# Altium PCB MODULAR_PCB.PcbDoc (part 1 of 2)
Units mil, origin at the board's own origin, x right, y up, seen from the top; angles counter-clockwise.
Board outline 3480 x 3849.93 mil, 2 copper layers (Top Layer, Bottom Layer); 170 components, 80 nets, 391 pads, 342 vias.
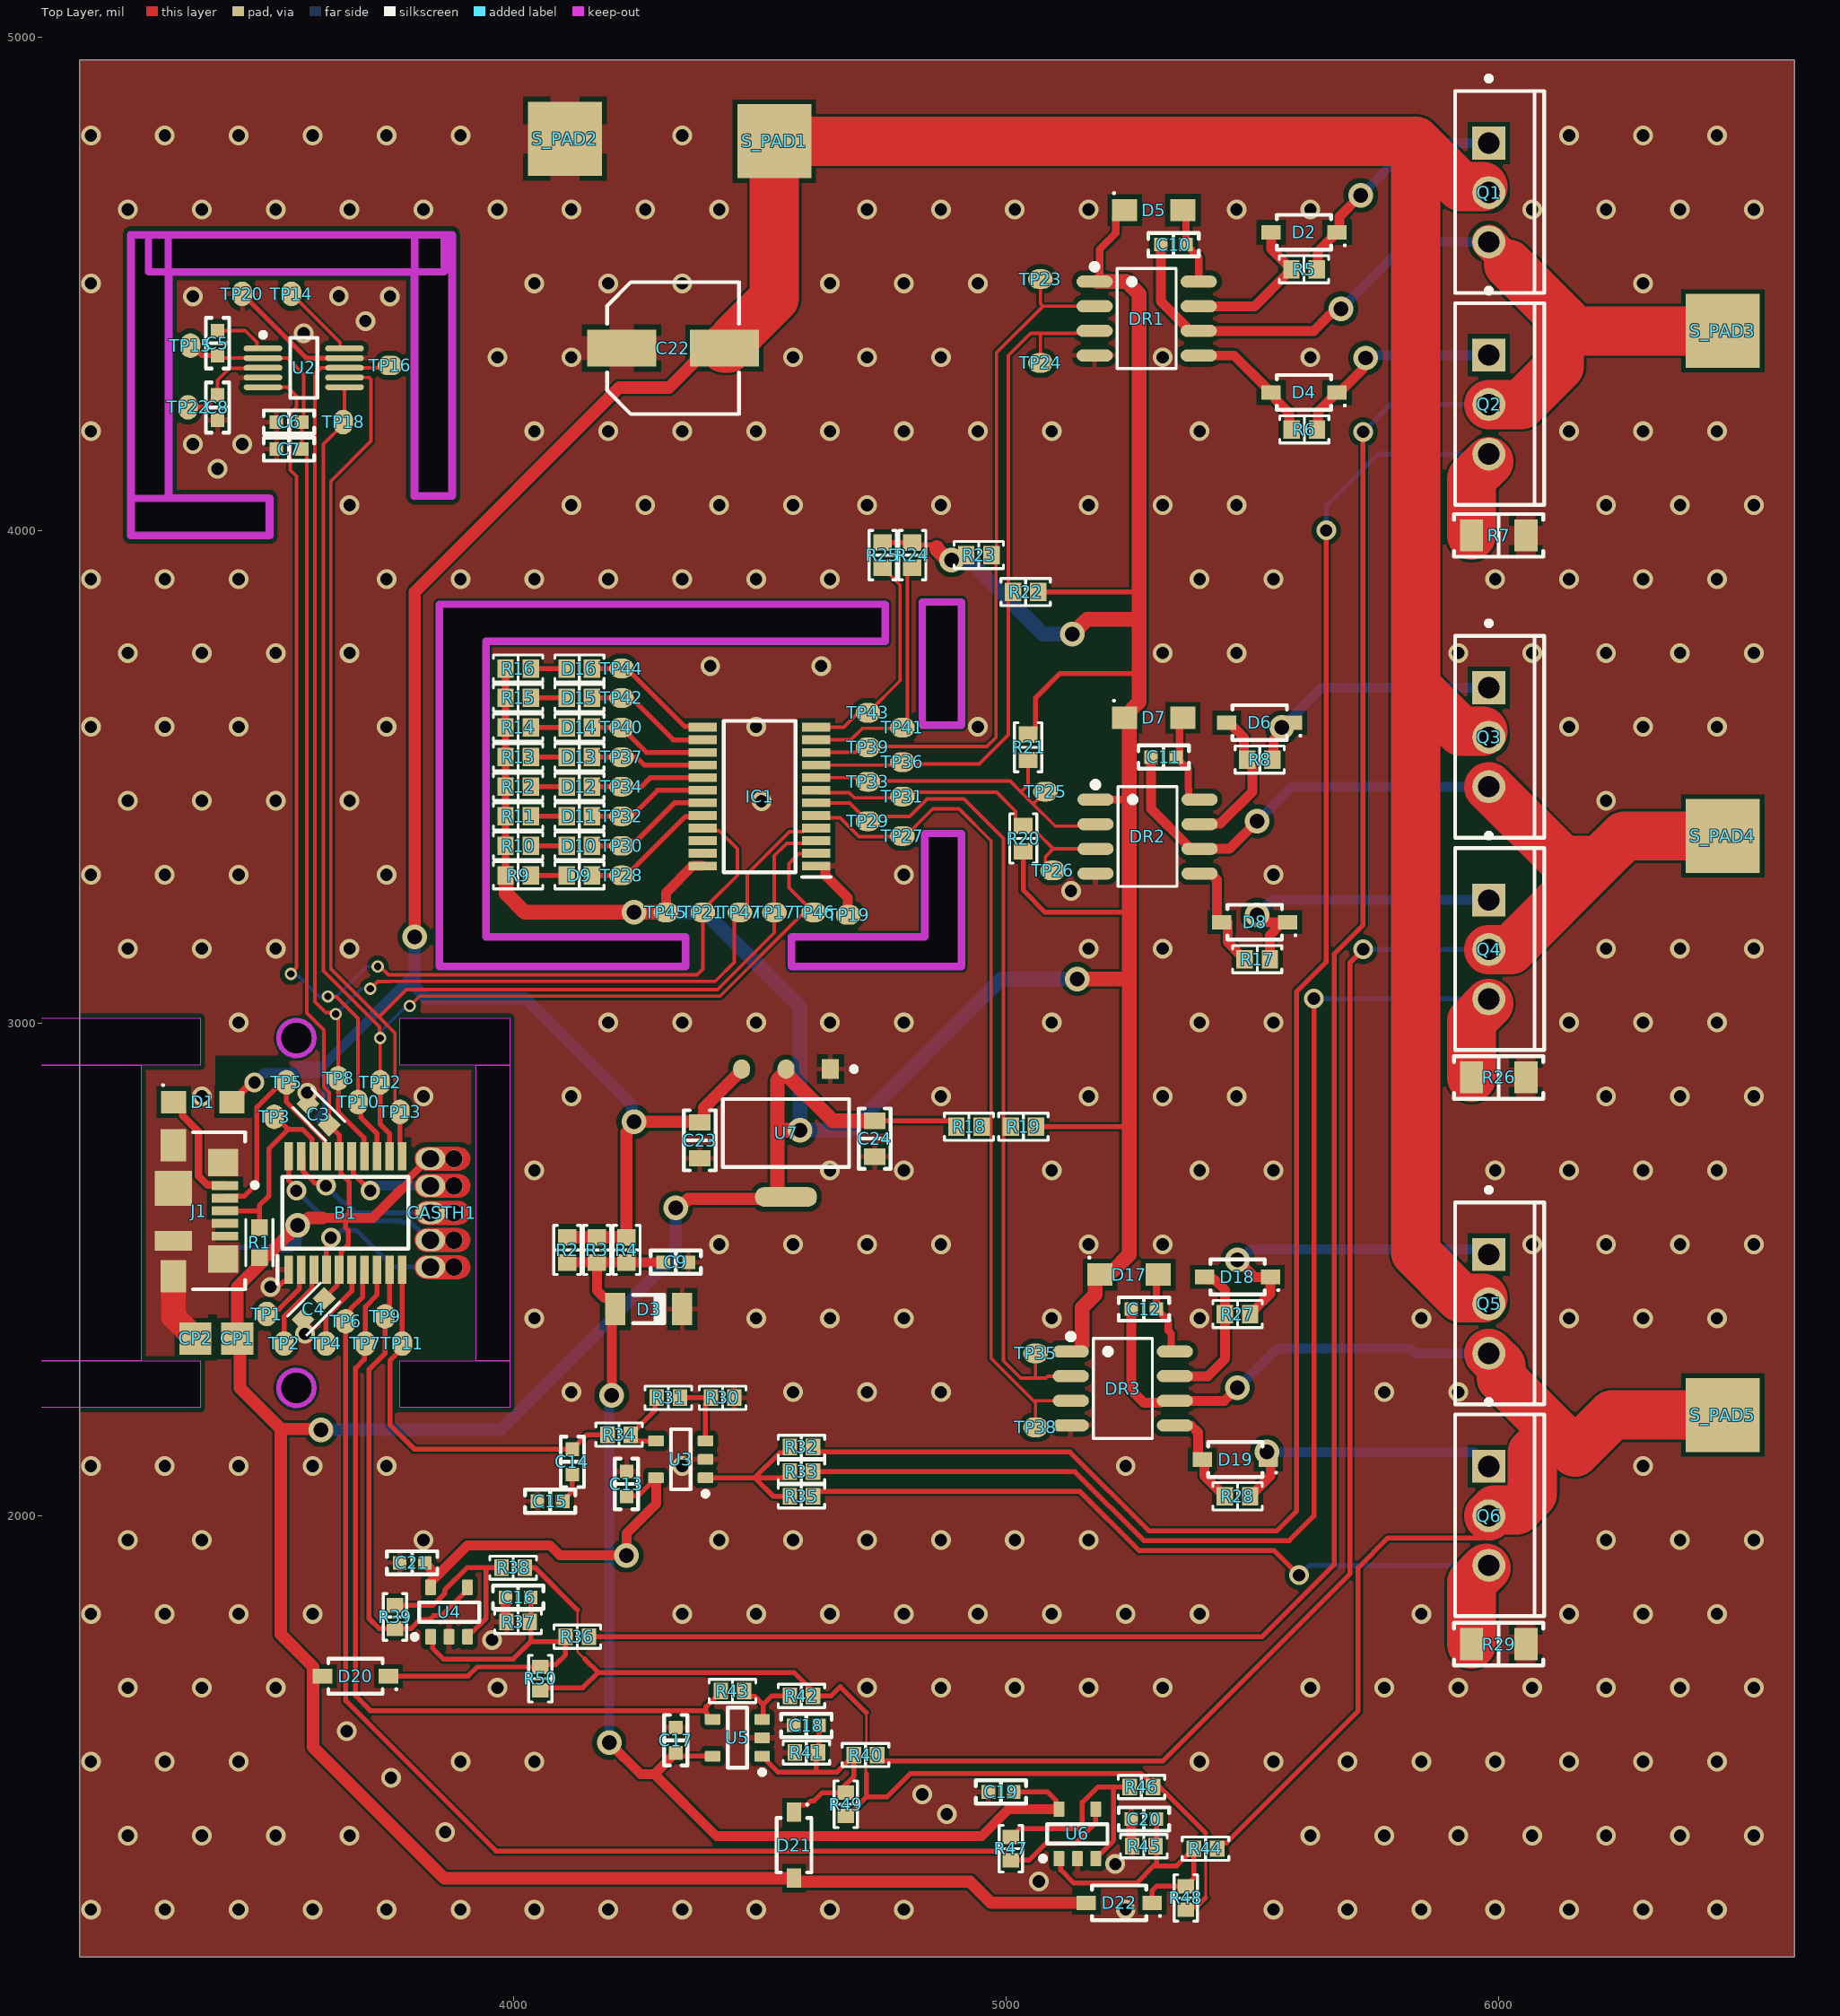
[diagram p0: Top Layer view]
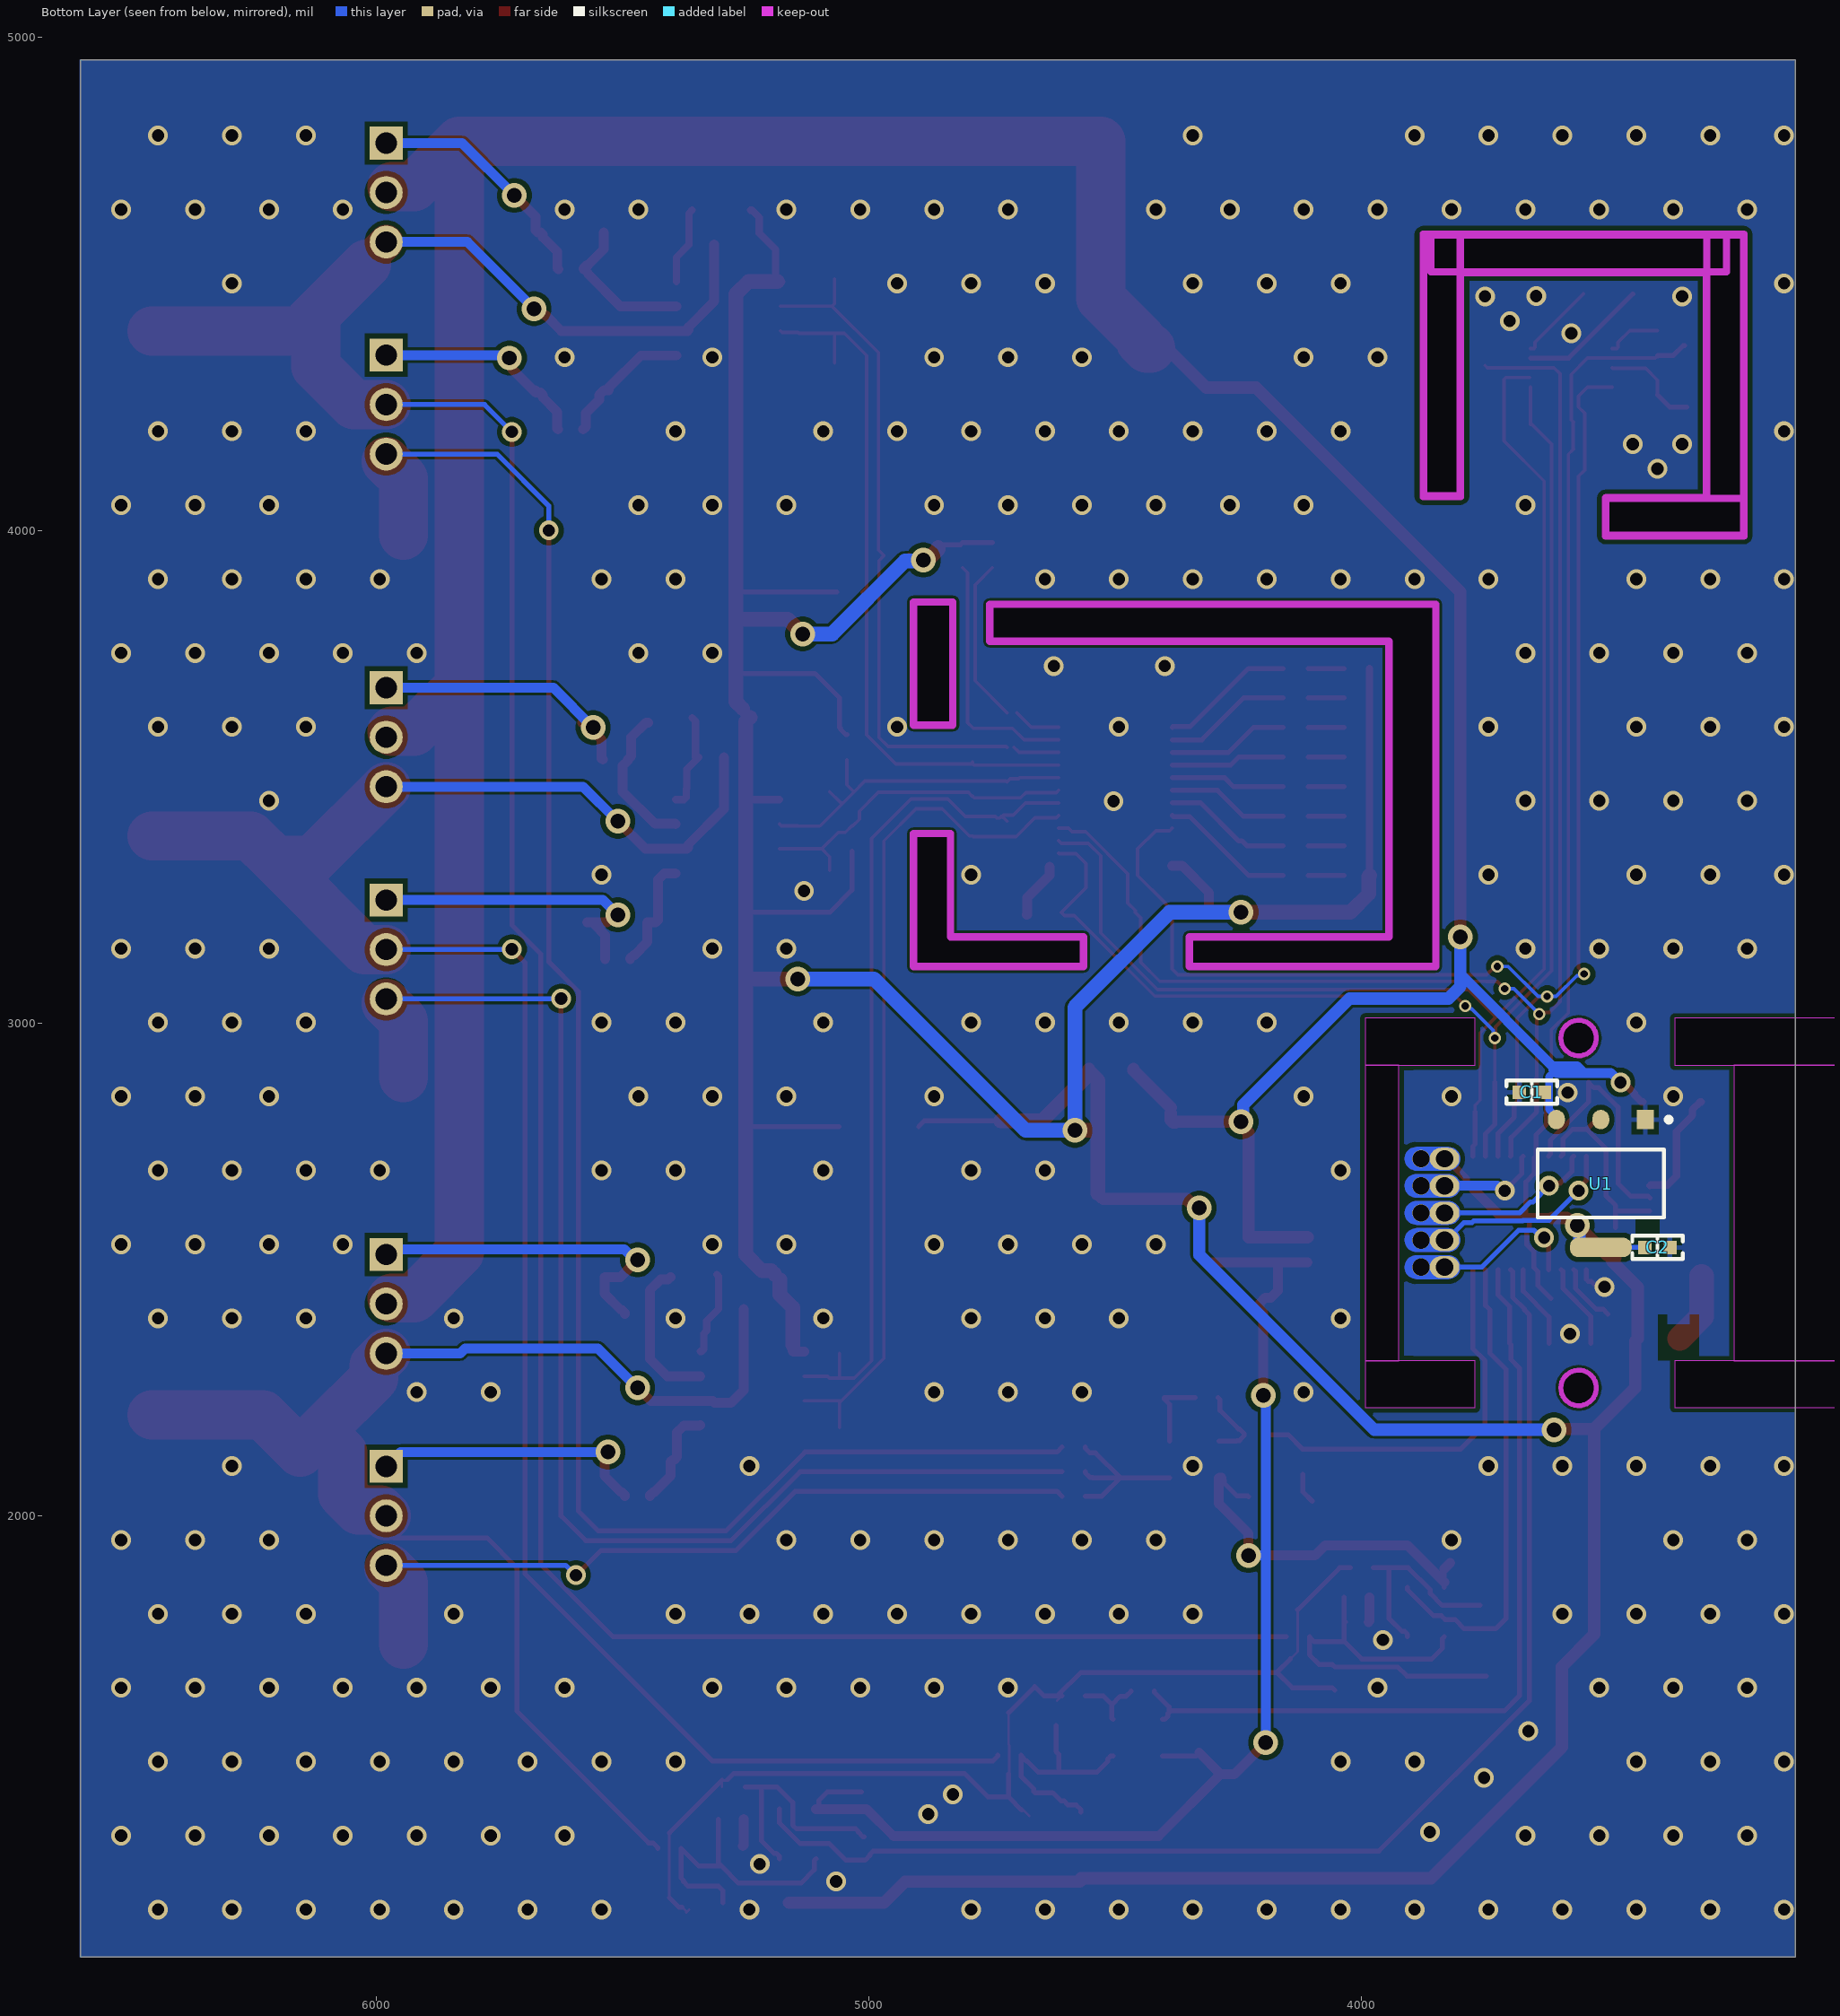
[diagram p1: Bottom Layer view, seen from below]
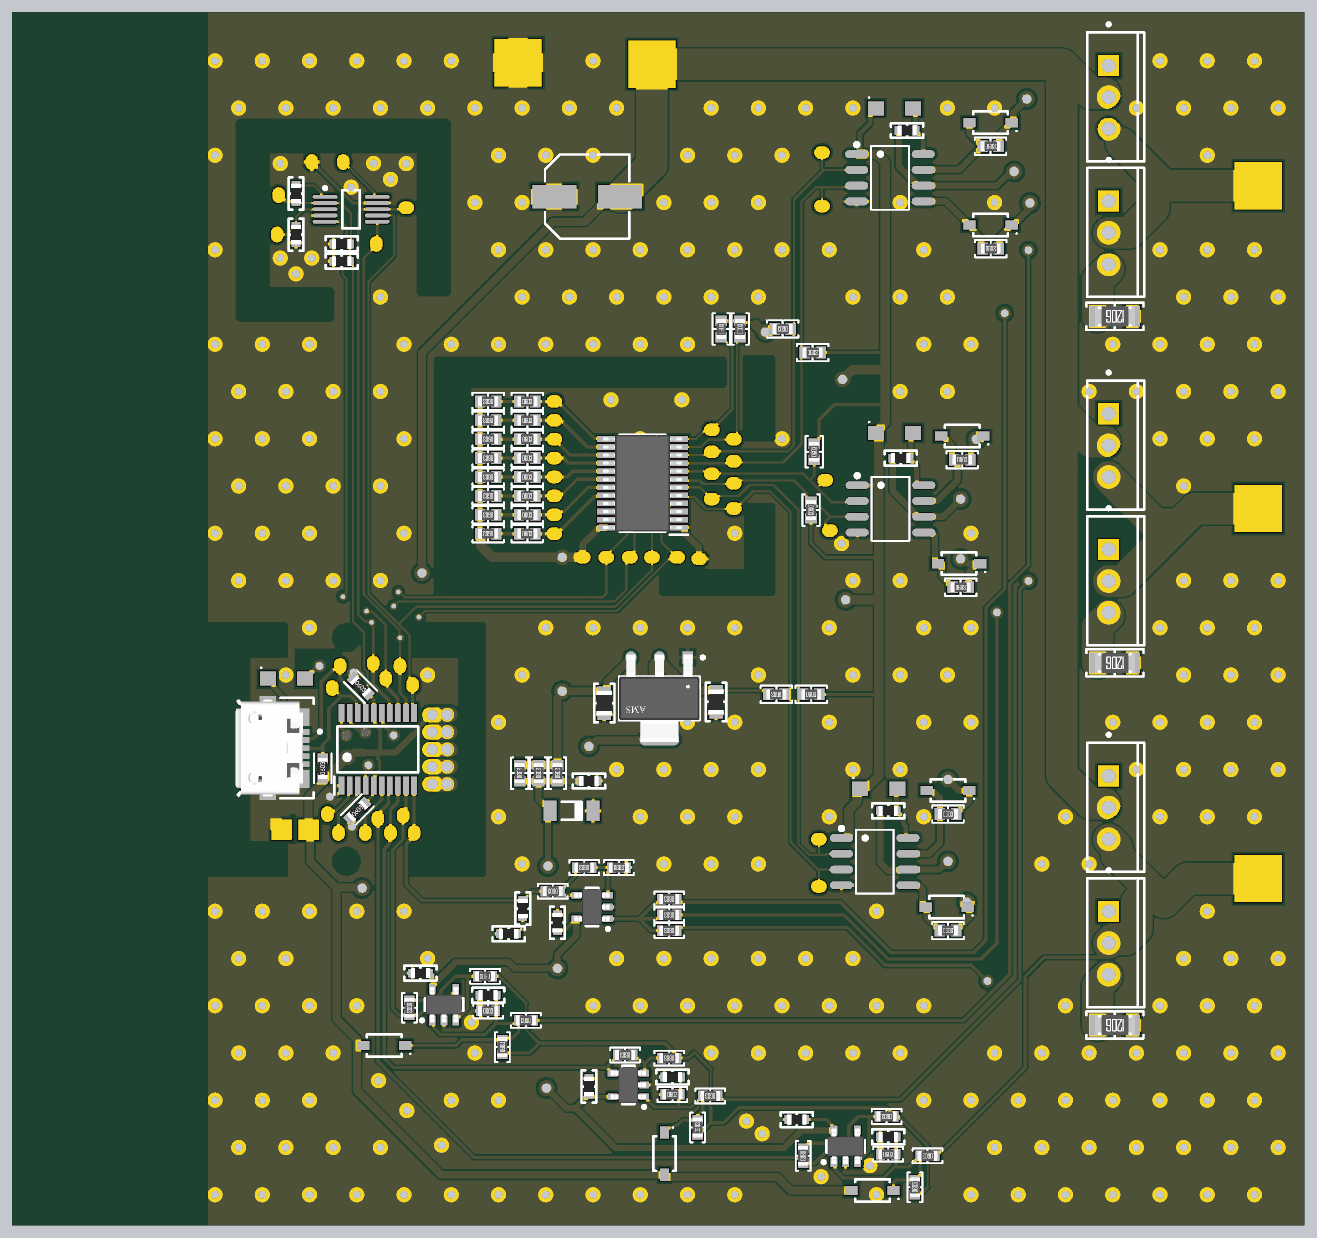
[diagram p3: 3D render of the assembled board from above, using the file's embedded part models]
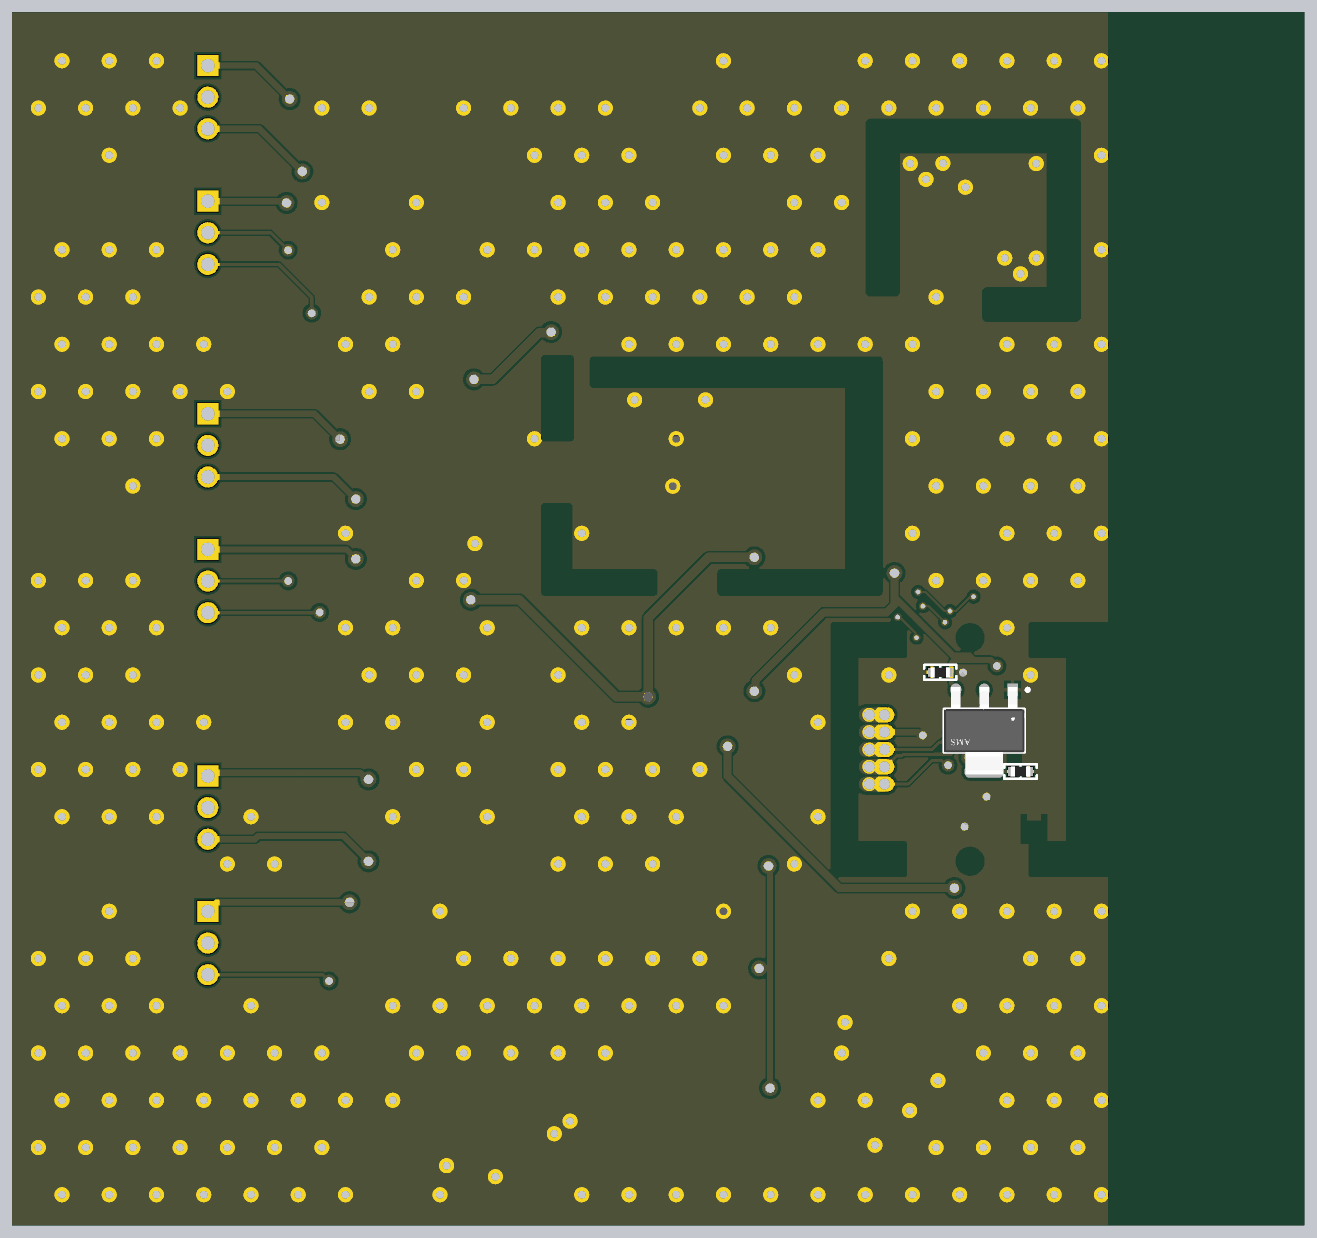
[diagram p4: 3D render of the assembled board from below, using the file's embedded part models]

## Layer stack, top to bottom
Top Solder: solder mask 0.4, Solder Resist, Dk 3.5
Top Layer: signal copper 1.4
Dielectric 1: dielectric 12.6, FR-4, Dk 4.8
Bottom Layer: signal copper 1.4
Bottom Solder: solder mask 0.4, Solder Resist, Dk 3.5

## Board outline
3120,1105.07 3120,4955 6600,4955 6600,1105.07
cut-out: 3225,3982.49 cw(c3225,3990) 3217.49,3990 3217.49,4600 cw(c3225,4600) 3225,4607.52 3875,4607.52 cw(c3875,4600) 3882.51,4600 3882.51,4070 cw(c3875,4070) 3875,4062.49 3800,4062.49 cw(c3800,4070) 3792.49,4070 3792.49,4517.48 3307.51,4517.48 3307.51,4072.51 3505,4072.51 cw(c3505,4065) 3512.51,4065 3512.51,3990 cw(c3505,3990) 3505,3982.49
cut-out: 3523.94,2260 ccw(c3560,2260) 3560,2223.94 ccw(c3560,2260) 3596.06,2260 ccw(c3560,2260) 3560,2296.06 ccw(c3560,2260)
cut-out: 3523.94,2970 ccw(c3560,2970) 3560,2933.94 ccw(c3560,2970) 3596.06,2970 ccw(c3560,2970) 3560,3006.06 ccw(c3560,2970)
cut-out: 3993,2315 3925,2315 3925,2915 3993,2915
cut-out: 4830,3605 4830,3855 4910,3855 4910,3605
cut-out: 3850,3115 3850,3850 4755,3850 4755,3775 3945,3775 3945,3175 4350,3175 4350,3115
cut-out: 4565,3115 4565,3175 4835,3175 4835,3385 4910,3385 4910,3115
cut-out: 3245,2315 2500,2315 2500,2915 3245,2915
cut-out: 3365,2315 3365,2220 2500,2220 2500,2315
cut-out: 3365,3010 3365,2915 2500,2915 2500,3010
cut-out: 3993,3010 3993,2915 3770,2915 3770,3010
cut-out: 3993,2315 3993,2220 3770,2220 3770,2315

## Design rules (kind name [scope] priority, off if disabled: settings)
Clearance [All] p1: gap=10 ignorepadtopadclearanceinfootprint=FALSE except(5: Arc-THPad Arc-Fill Arc-Poly Arc-Region Track-THPad Track-Fill Track-Poly Track-Region SMDPad-SMDPad SMDPad-THPad SMDPad-Via THPad-THPad; 6: Arc-Arc Arc-Track Arc-SMDPad Track-Track Track-SMDPad)
ComponentClearance [All] p1: gap=7 collisioncheckmode=3 verticalgap=10 showdistances=FALSE donotcheckwithout3dbody=TRUE
PolygonConnect res_1206 [All vs HasFootprint('RES 1206_3216')] p1: connectstyle=Relief reliefconductorwidth=40 reliefentries=4 polygonreliefangle="90 Angle" conductorbypadedge=TRUE mindistance=15 enablemindistance=FALSE airgapwidth=10
PolygonConnect USB [InNet('GND') vs HasFootprint('FP-473460001-MFG')] p2: connectstyle=Direct reliefconductorwidth=10 reliefentries=4 polygonreliefangle="90 Angle" airgapwidth=10
PolygonConnect POWER_PAD [InNet('GND') vs HasFootprint('POWER_PAD')] p3: thpad.connectstyle=Relief thpad.reliefconductorwidth=10 thpad.reliefentries=4 thpad.polygonreliefangle="90 Angle" thpad.airgapwidth=10 smdpad.connectstyle=Relief smdpad.reliefconductorwidth=60 smdpad.reliefentries=4 smdpad.polygonreliefangle="90 Angle" smdpad.airgapwidth=10 smdpad.conductorbypadedge=TRUE smdpad.mindistance=15 smdpad.enablemindistance=FALSE via.connectstyle=Relief via.reliefconductorwidth=10 via.reliefentries=4 via.polygonreliefangle="90 Angle" via.airgapwidth=10
PolygonConnect electrolytic_cap [All vs HasFootprint('CAPAE7266X80M')] p4: connectstyle=Relief reliefconductorwidth=50 reliefentries=4 polygonreliefangle="90 Angle" airgapwidth=10
PolygonConnect general [All] p5: thpad.connectstyle=Relief thpad.reliefconductorwidth=10 thpad.reliefentries=4 thpad.polygonreliefangle="90 Angle" thpad.airgapwidth=10 smdpad.connectstyle=Relief smdpad.reliefconductorwidth=10 smdpad.reliefentries=4 smdpad.polygonreliefangle="90 Angle" smdpad.airgapwidth=10 via.connectstyle=Direct via.reliefconductorwidth=10 via.reliefentries=4 via.polygonreliefangle="90 Angle" via.airgapwidth=10
RoutingVias [All] p1: holewidth=15 width=25 viastyle="Through Hole" minholewidth=12 minwidth=20 maxholewidth=30 maxwidth=50
SolderMaskExpansion [All] p1: expansion=4 istentingtop=FALSE
SupplyNets "Schematic Supply Nets_3" [InNet('+5')] p1: voltage=0.000
SupplyNets "Schematic Supply Nets_2" [InNet('12V')] p2: voltage=0.000
SupplyNets "Schematic Supply Nets_1" [InNet('GND')] p3: voltage=0.000
SupplyNets "Schematic Supply Nets" [InNet('3V3')] p4: voltage=0.000
Width [All] p1: maxlimit=100 minlimit=5 preferedwidth=7 minimp=50.000000 maximp=50.000000 favimp=50.000000
29 further rules are at their usual default settings.

## Classes and differential pairs
component class MAIN_DRIVER: C5 C6 C7 C8 C9 C10 C11 C12 C22 C23 C24 D2 D3 D4 D5 D6 D7 D8 D9 D10 D11 D12 D13 D14 D15 D16 D17 D18 D19 DR1 DR2 DR3 IC1 Q1 Q2 Q3 Q4 Q5 Q6 R2 R3 R4 R5 R6 R7 R8 R9 R10 R11 R12 R13 R14 R15 R16 R17 R18 R19 R20 R21 R22 R23 R24 R25 R26 R27 R28 R29 S_PAD1 S_PAD2 S_PAD3 S_PAD4 S_PAD5 TP14 TP15 TP16 TP17 TP18 TP19 TP20 TP21 TP22 TP23 TP24 TP25 TP26 TP27 TP28 TP29 TP30 TP31 TP32 TP33 TP34 TP35 TP36 TP37 TP38 TP39 TP40 TP41 TP42 TP43 TP44 TP45 TP46 TP47 U2 U7
component class Designator: B1 C1 C2 C3 C4 CASTH1 CP1 CP2 D1 J1 R1 TP1 TP2 TP3 TP4 TP5 TP6 TP7 TP8 TP9 TP10 TP11 TP12 TP13 U1

## Components (designator, comment, footprint, x,y, rotation, side; value= is the part's Value field where it differs from the comment)
B1 "ch32v203f6p6" SOP65P640X110-20N 3659.57,2615.16 r90 top
C1 "Capacitor" "CAP FILM 0603_1608" 3655,2860 r180 bottom value=10u
C2 "Capacitor" "CAP FILM 0603_1608" 3400,2545 r0 bottom value=10u
C3 "Capacitor" SMD-0603-RES 3605,2815 r225 top value=100n
C4 "Capacitor" SMD-0603-RES 3595,2420 r315 top value=100n
C5 "Capacitor" "CAP FILM 0603_1608" 3400,4380 r270 top value=100n
C6 "Capacitor" "CAP FILM 0603_1608" 3545,4220 r0 top value=100n
C7 "Capacitor" "CAP FILM 0603_1608" 3545,4165 r180 top value=10u
C8 "Capacitor" "CAP FILM 0603_1608" 3400,4249.41 r90 top value=100n
C9 "Capacitor" "CAP FILM 0603_1608" 4330,2515 r180 top value=1u
C10 "Capacitor" "CAP FILM 0603_1608" 5340,4580 r0 top value=10uF
C11 "Capacitor" "CAP FILM 0603_1608" 5320,3540 r180 top value=10uF
C12 "Capacitor" "CAP FILM 0603_1608" 5280,2420 r0 top value=10uF
C13 "Capacitor" "CAP FILM 0603_1608" 4230,2065 r90 top value=100n
C14 "Capacitor" "CAP FILM 0603_1608" 4120,2110 r90 top value=1n
C15 "Capacitor" "CAP FILM 0603_1608" 4075,2030 r0 top value=1n
C16 "Capacitor" "CAP FILM 0603_1608" 4010,1835 r0 top value=1n
C17 "Capacitor" "CAP FILM 0603_1608" 4330,1545 r90 top value=100n
C18 "Capacitor" "CAP FILM 0603_1608" 4595,1575 r0 top value=1n
C19 "Capacitor" "CAP FILM 0603_1608" 4990,1440 r180 top value=100n
C20 "Capacitor" "CAP FILM 0603_1608" 5280,1385 r0 top value=1n
C21 "Capacitor" "CAP FILM 0603_1608" 3795,1905 r180 top value=100n
C22 "Capacitor" CAPAE7266X80M 4324.33,4370 r0 top value=150u
C23 "Capacitor" "CAP FILM 0805" 4378.68,2762.27 r90 top value=10u
C24 "Capacitor" "CAP FILM 0805" 4733.68,2765.85 r90 top value=10u
CASTH1 "CastHeaderx5" CASTHEADERX5 3842.47,2630.71 r180 top
CP1 "CONNECT_PAD" PAD_SQUARE 3440,2360 r90 top
CP2 "CONNECT_PAD" PAD_SQUARE 3355,2360 r180 top
D1 "FR107" SODFL365X110-2N 3370,2840 r0 top
D2 "1N4148" SODFL375X135-2N 5605,4605 r180 top
D3 "Zener Diode" DIOMELF3514N 4275,2420 r180 top
D4 "1N4148" SODFL375X135-2N 5605,4280 r180 top
D5 "Diode" SODFL365X110-2N 5300,4650 r0 top
D6 "1N4148" SODFL375X135-2N 5515,3610 r180 top
D7 "Diode" SODFL365X110-2N 5300,3620 r0 top
D8 "1N4148" SODFL375X135-2N 5505,3205 r180 top
D9 "Light-Emitting Diode" "RES 0603_1608" 4134.41,3300 r0 top
D10 "Light-Emitting Diode" "RES 0603_1608" 4134.41,3360 r0 top
D11 "Light-Emitting Diode" "RES 0603_1608" 4134.41,3420 r0 top
D12 "Light-Emitting Diode" "RES 0603_1608" 4134.41,3480 r0 top
D13 "Light-Emitting Diode" "RES 0603_1608" 4134.41,3540 r0 top
D14 "Light-Emitting Diode" "RES 0603_1608" 4134.41,3600 r0 top
D15 "Light-Emitting Diode" "RES 0603_1608" 4134.41,3660 r0 top
D16 "Light-Emitting Diode" "RES 0603_1608" 4134.41,3720 r0 top
D17 "Diode" SODFL365X110-2N 5250,2490 r0 top
D18 "1N4148" SODFL375X135-2N 5470,2485 r180 top
D19 "1N4148" SODFL375X135-2N 5465.6,2114.48 r180 top
D20 "1N4148W" SODFL375X135-2N 3680,1675 r180 top
D21 "1N4148W" SODFL375X135-2N 4570,1331.93 r270 top
D22 "1N4148W" SODFL375X135-2N 5230,1215 r180 top
DR1 "GR3115" PCBComponent_1 5278.29,4431.12 r270 top
DR2 "GR3115" PCBComponent_1 5280,3380 r270 top
DR3 "GR3115" PCBComponent_1 5230,2260 r270 top
IC1 "STP16C596ATTR" SOP65P638X110-24N 4500,3460 r180 top
J1 "473460001" FP-473460001-MFG 3324.06,2619.41 r270 top
Q1 "STP80NF55-06" STM-TO-220A-3 5980,4685.79 r0 top
Q2 "STP80NF55-06" STM-TO-220A-3 5980,4255.39 r0 top
Q3 "STP80NF55-06" STM-TO-220A-3 5980,3580.39 r0 top
Q4 "STP80NF55-06" STM-TO-220A-3 5980,3149.61 r0 top
Q5 "STP80NF55-06" STM-TO-220A-3 5980,2430.39 r0 top
Q6 "STP80NF55-06" STM-TO-220A-3 5980,2000.39 r0 top
R1 "Resistor" SMD-0603-RES 3485,2555 r0 top value=10K
R2 "Resistor" "RES 0603_1608" 4110,2540 r90 top value=1K
R3 "Resistor" "RES 0603_1608" 4170,2540 r90 top value=1K
R4 "Resistor" "RES 0603_1608" 4230,2540 r90 top value=1K
R5 "Resistor" "RES 0603_1608" 5605,4530 r0 top value=10R
R6 "Resistor" "RES 0603_1608" 5605.59,4205 r0 top value=10R
R7 "Resistor" "RES 1206_3216" 6000,3990 r180 top value=0.001R
R8 "Resistor" "RES 0603_1608" 5515,3535 r0 top value=10R
R9 "Resistor" "RES 0603_1608" 4010,3300 r180 top value=100R
R10 "Resistor" "RES 0603_1608" 4010,3360 r180 top value=100R
R11 "Resistor" "RES 0603_1608" 4010,3420 r180 top value=100R
R12 "Resistor" "RES 0603_1608" 4010,3480 r180 top value=100R
R13 "Resistor" "RES 0603_1608" 4010,3540 r180 top value=100R
R14 "Resistor" "RES 0603_1608" 4010,3600 r180 top value=100R
R15 "Resistor" "RES 0603_1608" 4010,3660 r180 top value=100R
R16 "Resistor" "RES 0603_1608" 4010,3720 r180 top value=100R
R17 "Resistor" "RES 0603_1608" 5510,3130 r0 top value=10R
R18 "Resistor" "RES 0603_1608" 4925,2790 r180 top value=10K
R19 "Resistor" "RES 0603_1608" 5035.59,2790 r0 top value=10K
R20 "Resistor" "RES 0603_1608" 5035,3375 r270 top value=10K
R21 "Resistor" "RES 0603_1608" 5045,3560 r90 top value=10K
R22 "Resistor" "RES 0603_1608" 5040,3875 r0 top value=10K
R23 "Resistor" "RES 0603_1608" 4945,3950 r180 top value=10K
R24 "Resistor" "RES 0603_1608" 4810,3950 r90 top value=10K
R25 "Resistor" "RES 0603_1608" 4750,3950 r90 top value=10K
R26 "Resistor" "RES 1206_3216" 6000,2890 r180 top value=0.001R
R27 "Resistor" "RES 0603_1608" 5470,2410 r0 top value=10R
R28 "Resistor" "RES 0603_1608" 5470,2040 r0 top value=10R
R29 "Resistor" "RES 1206_3216" 6000,1740 r180 top value=0.001R
R30 "Resistor" "RES 0603_1608 RF" 4425,2240 r0 top value=5K1
R31 "Resistor" "RES 0603_1608 RF" 4315,2240 r180 top value=39K
R32 "Resistor" "RES 0603_1608 RF" 4585,2140 r180 top value=1K
R33 "Resistor" "RES 0603_1608 RF" 4585,2090 r180 top value=1K
R34 "Resistor" "RES 0603_1608 RF" 4215,2165 r180 top value=5.1K
R35 "Resistor" "RES 0603_1608 RF" 4585,2040 r180 top value=1K
R36 "Resistor" "RES 0603_1608 RF" 4130,1755 r180 top value=22K
R37 "Resistor" "RES 0603_1608 RF" 4010,1785 r0 top value=4K7
R38 "Resistor" "RES 0603_1608 RF" 4000,1895 r180 top value=16K
R39 "Resistor" "RES 0603_1608 RF" 3760,1795 r270 top value=10K
R40 "Resistor" "RES 0603_1608 RF" 4715,1515 r180 top value=22K
R41 "Resistor" "RES 0603_1608 RF" 4595,1520 r0 top value=4K7
R42 "Resistor" "RES 0603_1608 RF" 4585,1635 r180 top value=16K
R43 "Resistor" "RES 0603_1608 RF" 4445,1645 r180 top value=10K
R44 "Resistor" "RES 0603_1608 RF" 5405,1325 r180 top value=22K
R45 "Resistor" "RES 0603_1608 RF" 5280,1330 r0 top value=4K7
R46 "Resistor" "RES 0603_1608 RF" 5275,1450 r180 top value=16K
R47 "Resistor" "RES 0603_1608 RF" 5010,1325 r270 top value=10K
R48 "Resistor" "RES 0603_1608 RF" 5365,1225 r90 top value=22K
R49 "Resistor" "RES 0603_1608 RF" 4675,1415 r90 top value=22K
R50 "Resistor" "RES 0603_1608 RF" 4055,1670 r90 top value=22K
S_PAD1 "SOLDER_PAD" POWER_PAD 4530,4790 r180 top
S_PAD2 "SOLDER_PAD" POWER_PAD 4105,4795 r180 top
S_PAD3 "SOLDER_PAD" POWER_PAD 6455,4405 r180 top
S_PAD4 "SOLDER_PAD" POWER_PAD 6455,3380 r180 top
S_PAD5 "SOLDER_PAD" POWER_PAD 6455,2205 r180 top
TP1 "Value" ROUND_SMALL 3500,2410 r180 top
TP2 "Value" ROUND_SMALL 3535,2350 r180 top
TP3 "Value" ROUND_SMALL 3515,2810 r180 top
TP4 "Value" ROUND_SMALL 3620,2350 r0 top
TP5 "Value" ROUND_SMALL 3540,2880 r180 top
TP6 "Value" ROUND_SMALL 3660,2395 r180 top
TP7 "Value" ROUND_SMALL 3700,2350 r180 top
TP8 "Value" ROUND_SMALL 3645,2888.33 r180 top
TP9 "Value" ROUND_SMALL 3740,2405 r180 top
TP10 "Value" ROUND_SMALL 3685,2840 r180 top
TP11 "Value" ROUND_SMALL 3775,2350 r180 top
TP12 "Value" ROUND_SMALL 3730,2880 r180 top
TP13 "Value" ROUND_SMALL 3770,2820 r180 top
TP14 "=Value" ROUND_SMALL 3550,4480 r180 top
TP15 "=Value" ROUND_SMALL 3345,4375 r180 top
TP16 "=Value" ROUND_SMALL 3750,4335 r90 top
TP17 "=Value" ROUND_SMALL 4530,3225 r90 top
TP18 "=Value" ROUND_SMALL 3655,4220 r180 top
TP19 "=Value" ROUND_SMALL 4680,3220 r90 top
TP20 "=Value" ROUND_SMALL 3450,4480 r180 top
TP21 "=Value" ROUND_SMALL 4385,3225 r90 top
TP22 "=Value" ROUND_SMALL 3340,4250 r180 top
TP23 "=Value" ROUND_SMALL 5070,4510 r90 top
TP24 "=Value" ROUND_SMALL 5070,4340 r90 top
TP25 "=Value" ROUND_SMALL 5080,3470 r90 top
TP26 "=Value" ROUND_SMALL 5095,3310 r90 top
TP27 "=Value" ROUND_SMALL 4790,3380 r90 top
TP28 "=Value" ROUND_SMALL 4220,3300 r270 top
TP29 "=Value" ROUND_SMALL 4720,3410 r90 top
TP30 "=Value" ROUND_SMALL 4220,3360 r270 top
TP31 "=Value" ROUND_SMALL 4790,3460 r90 top
TP32 "=Value" ROUND_SMALL 4220,3420 r270 top
TP33 "=Value" ROUND_SMALL 4720,3490 r90 top
TP34 "=Value" ROUND_SMALL 4220,3480 r270 top
TP35 "=Value" ROUND_SMALL 5060,2330 r90 top
TP36 "=Value" ROUND_SMALL 4790,3530 r90 top
TP37 "=Value" ROUND_SMALL 4220,3540 r270 top
TP38 "=Value" ROUND_SMALL 5060,2180 r90 top
TP39 "=Value" ROUND_SMALL 4720,3560 r90 top
TP40 "=Value" ROUND_SMALL 4220,3600 r270 top
TP41 "=Value" ROUND_SMALL 4790,3600 r270 top
TP42 "=Value" ROUND_SMALL 4220,3660 r270 top
TP43 "=Value" ROUND_SMALL 4720,3630 r270 top
TP44 "=Value" ROUND_SMALL 4220,3720 r270 top
TP45 "=Value" ROUND_SMALL 4310,3225 r90 top
TP46 "=Value" ROUND_SMALL 4610,3225 r90 top
TP47 "=Value" ROUND_SMALL 4460,3225 r90 top
U1 "AMS1117-3.3" FP-AMS1117-IPC_C 3515,2674.72 r270 bottom
U2 "AD9833WBRMZ-REEL" ADI-RM-10_M 3575,4330 r0 top
U3 "LM321MF" DBV0005A_L 4340,2115 r180 top
U4 "LM321MF" DBV0005A_L 3870,1805 r90 top
U5 "LM321MF" DBV0005A_L 4455,1550 r180 top
U6 "LM321MF" DBV0005A_L 5145,1355 r90 top
U7 "AMS1117-3.3" FP-AMS1117-IPC_C 4553.68,2777.27 r270 top

## Footprints (in the part's own frame and the unit in brackets; to place one, negate y for a bottom-side part, rotate by r counter-clockwise, add the part's x,y. Pads: shape width x height; smd on the part's side, far side on the other; paste and mask are expansions set on the pad)
ADI-RM-10_M [mm] "TSSOP, 10-Leads, Body 3x3mm, Pitch 0.5mm, IPC Low Density"
  oval 2x0.3 smd: 1(-2.1,1) 2(-2.1,0.5) 3(-2.1,0) 4(-2.1,-0.5) 5(-2.1,-1) 6(2.1,-1) 7(2.1,-0.5) 8(2.1,0) 9(2.1,0.5) 10(2.1,1)
  silkscreen extent -2.22,-1.55 0.7,1.82, body extent -1.55,-1.55 1.55,1.55, height 1.1
"CAP FILM 0603_1608" [mm] "Chip Capacitor, 2-Leads, Body 1.60x0.80mm, IPC Medium Density"
  rect 0.7x0.7 smd: 1(-0.65,0) 2(0.65,0)
  silkscreen extent -1.3,-0.6 1.3,0.6, body extent -0.8,-0.4 0.8,0.4, height 0.7
"CAP FILM 0805" [mm] "J2, Film Capacitor PPS , 2-Leads, Body 2.00x1.25mm, IPC Medium Density"
  rect 0.85x1.1 smd: 1(-0.925,0) 2(0.925,0)
  silkscreen extent -1.55,-0.82 1.55,0.82, body extent -1,-0.62 1,0.62, height 1.2
CAPAE7266X80M [mm] "Aluminum Electrolytic Capacitor, Body 6.60x6.60x8.00mm, IPC Low Density"
  rect 3.55x1.9 smd: 1(-2.65,0) 2(2.65,0)
  silkscreen extent -3.4,-3.4 3.4,3.4, body extent -3.4,-3.4 3.4,3.4, height 8
CASTHEADERX5 [mil]
  round 36 hole 35: 1(-37.53,125.71) 2(-37.53,70.71) 3(-37.53,15.71) 4(-37.53,-39.29) 5(-37.53,-94.29)
  oval 60x45 hole 35: 1(10.47,125.71) 2(10.47,70.71) 3(10.47,15.71) 4(10.47,-39.29) 5(10.47,-94.29)
  Top Layer region: -46.79,101.71 18.21,101.71 28.62,104.08 36.97,110.74 41.6,120.37 41.6,131.05 36.97,140.67 28.62,147.33 18.21,149.71 18.21,149.71 -46.79,149.71 -57.21,147.33 -65.56,140.67 -70.19,131.05 -70.19,120.37 -65.56,110.74 -57.21,104.08 -46.79,101.71
  Top Layer region: -46.79,-118.29 18.21,-118.29 28.62,-115.92 36.97,-109.26 41.6,-99.63 41.6,-88.95 36.97,-79.33 28.62,-72.67 18.21,-70.29 18.21,-70.29 -46.79,-70.29 -57.21,-72.67 -65.56,-79.33 -70.19,-88.95 -70.19,-99.63 -65.56,-109.26 -57.21,-115.92 -46.79,-118.29
  Top Layer region: -46.79,-63.29 18.21,-63.29 28.62,-60.92 36.97,-54.26 41.6,-44.63 41.6,-33.95 36.97,-24.33 28.62,-17.67 18.21,-15.29 18.21,-15.29 -46.79,-15.29 -57.21,-17.67 -65.56,-24.33 -70.19,-33.95 -70.19,-44.63 -65.56,-54.26 -57.21,-60.92 -46.79,-63.29
  Top Layer region: -46.79,-8.29 18.21,-8.29 28.62,-5.92 36.97,0.74 41.6,10.37 41.6,21.05 36.97,30.67 28.62,37.33 18.21,39.71 18.21,39.71 -46.79,39.71 -57.21,37.33 -65.56,30.67 -70.19,21.05 -70.19,10.37 -65.56,0.74 -57.21,-5.92 -46.79,-8.29
  Top Layer region: -46.79,46.71 18.21,46.71 28.62,49.08 36.97,55.74 41.6,65.37 41.6,76.05 36.97,85.67 28.62,92.33 18.21,94.71 18.21,94.71 -46.79,94.71 -57.21,92.33 -65.56,85.67 -70.19,76.05 -70.19,65.37 -65.56,55.74 -57.21,49.08 -46.79,46.71
  Bottom Layer region: -46.79,101.71 18.21,101.71 28.62,104.08 36.97,110.74 41.6,120.37 41.6,131.05 36.97,140.67 28.62,147.33 18.21,149.71 18.21,149.71 -46.79,149.71 -57.21,147.33 -65.56,140.67 -70.19,131.05 -70.19,120.37 -65.56,110.74 -57.21,104.08 -46.79,101.71
  Bottom Layer region: -46.79,-118.29 18.21,-118.29 28.62,-115.92 36.97,-109.26 41.6,-99.63 41.6,-88.95 36.97,-79.33 28.62,-72.67 18.21,-70.29 18.21,-70.29 -46.79,-70.29 -57.21,-72.67 -65.56,-79.33 -70.19,-88.95 -70.19,-99.63 -65.56,-109.26 -57.21,-115.92 -46.79,-118.29
  Bottom Layer region: -46.79,-63.29 18.21,-63.29 28.62,-60.92 36.97,-54.26 41.6,-44.63 41.6,-33.95 36.97,-24.33 28.62,-17.67 18.21,-15.29 18.21,-15.29 -46.79,-15.29 -57.21,-17.67 -65.56,-24.33 -70.19,-33.95 -70.19,-44.63 -65.56,-54.26 -57.21,-60.92 -46.79,-63.29
  Bottom Layer region: -46.79,-8.29 18.21,-8.29 28.62,-5.92 36.97,0.74 41.6,10.37 41.6,21.05 36.97,30.67 28.62,37.33 18.21,39.71 18.21,39.71 -46.79,39.71 -57.21,37.33 -65.56,30.67 -70.19,21.05 -70.19,10.37 -65.56,0.74 -57.21,-5.92 -46.79,-8.29
  Bottom Layer region: -46.79,46.71 18.21,46.71 28.62,49.08 36.97,55.74 41.6,65.37 41.6,76.05 36.97,85.67 28.62,92.33 18.21,94.71 18.21,94.71 -46.79,94.71 -57.21,92.33 -65.56,85.67 -70.19,76.05 -70.19,65.37 -65.56,55.74 -57.21,49.08 -46.79,46.71
DBV0005A_L [mm] "SOT23, 5-Leads, Body 3.05x1.75mm, Pitch 0.95mm, IPC High Density"
  rrect18% 0.8x0.55 smd: 1(-1.275,0.95) 2(-1.275,0) 3(-1.275,-0.95) 4(1.275,-0.95) 5(1.275,0.95)
  silkscreen extent -1.4,-1.55 0.5,1.9, body extent -1.42,-1.46 1.42,1.46, height 1.08
DIOMELF3514N [mm] "MELF Diode, 2-Leads, Body 3.50x1.45mm, IPC Medium Density"
  rect 1.05x1.65 smd: 1(-1.725,0) 2(1.725,0)
  silkscreen extent -0.8,-0.73 0.8,0.72, body extent -1.8,-0.75 1.8,0.75, height 1.5
FP-473460001-MFG [mm]
  rect 0.45x1.38 smd paste+0 mask+0: 1(-1.3,2.31) 2(-0.65,2.31) 3(0,2.31) 4(0.65,2.31) 5(1.3,2.31)
  rect 1.425x1.55 smd paste+0 mask+0: 6(-2.488,2.225) 7(2.488,2.225)
  rect 1.65x1.3 smd paste+0 mask+0: 8(-3.375,-0.35) 11(3.375,-0.35)
  rect 1.8x1.9 smd paste+0 mask+0: 9(-1.15,-0.35)
  rect 1x1.9 smd paste+0 mask+0: 10(1.55,-0.35)
  silkscreen extent -4.05,0.67 4.05,3.98, body extent -4.3,-2.48 4.3,3.45, height 0.25
FP-AMS1117-IPC_C [mm]
  rect 1.004x0.872 smd paste+0 mask+0: 1(-3.295,2.29)
  rrect100% 1.004x0.872 smd paste+0 mask+0: 2(-3.295,0) 3(-3.295,-2.29)
  rrect87% 1.004x3.182 smd paste+0 mask+0: 4(3.295,0)
  silkscreen extent -3.42,-3.25 1.75,3.62, body extent -3.53,-3.25 3.53,3.25, height 1.8
PAD_SQUARE [mil]
  rect 65x65 smd paste-99999: 1(0,0)
PCBComponent_1 [mm]
  oval 0.63x1.865 smd paste+0 mask+0.051: 1(-1.877,-2.497) 2(-0.607,-2.497) 3(0.663,-2.497) 4(1.933,-2.497) 5(1.933,2.868) 6(0.663,2.868) 7(-0.607,2.868) 8(-1.877,2.868)
  silkscreen extent -2.79,-2.65 2.6,1.71
POWER_PAD [mil]
  rect 150x150 smd paste-99999: 1(0,0)
"RES 0603_1608" [mm] "Chip Resistor, 2-Leads, Body 1.60x0.80mm, IPC Medium Density"
  rect 0.85x0.95 smd: 1(-0.65,0) 2(0.65,0)
  silkscreen extent -1.27,-0.7 1.27,0.7, body extent -0.8,-0.4 0.8,0.4, height 0.45
"RES 0603_1608 RF" [mm] "Chip Resistor, 2-Leads, Body 1.60x0.80mm, IPC High Density"
  rect 0.75x0.85 smd: 1(-0.6,0) 2(0.6,0)
  silkscreen extent -1.2,-0.6 1.2,0.6, body extent -0.8,-0.4 0.8,0.4, height 0.45
"RES 1206_3216" [mm] "Chip Resistor, 2-Leads, Body 3.13x1.55mm, IPC Medium Density"
  rect 1.2x1.65 smd: 1(-1.4,0) 2(1.4,0)
  silkscreen extent -2.3,-1.1 2.3,1.1, body extent -1.6,-0.8 1.6,0.8, height 0.6
ROUND_SMALL [mil]
  oval 40x50 smd paste-99999: 1(0,0)
SMD-0603-RES [mm]
  rect 0.85x0.85 smd: 1(0,0.775) 2(0,-0.775)
  silkscreen extent -0.7,-1.2 0.7,1.2, body extent -0.4,-0.85 0.4,0.85, height 0.56
SODFL365X110-2N [mm] "SODFL, 2-Leads, Body 1.80x3.65mm, IPC Medium Density"
  rect 1.3x1.15 smd: 1(-1.5,0) 2(1.5,0)
  silkscreen extent -2.1,0.83 -2,0.92, body extent -1.45,-0.95 1.45,0.95, height 1.1
SODFL375X135-2N [mm] "SODFL, 2-Leads, Body 1.60x3.75mm, IPC Medium Density"
  rect 1x0.75 smd: 1(-1.7,0) 2(1.7,0)
  silkscreen extent -2.15,-0.9 1.4,0.9, body extent -1.4,-0.9 1.4,0.9, height 1.35
SOP65P638X110-24N [mm]
  rect 1.45x0.45 smd: 1(-2.925,3.575) 2(-2.925,2.925) 3(-2.925,2.275) 4(-2.925,1.625) 5(-2.925,0.975) 6(-2.925,0.325) 7(-2.925,-0.325) 8(-2.925,-0.975) 9(-2.925,-1.625) 10(-2.925,-2.275) 11(-2.925,-2.925) 12(-2.925,-3.575) 13(2.925,-3.575) 14(2.925,-2.925) 15(2.925,-2.275) 16(2.925,-1.625) 17(2.925,-0.975) 18(2.925,-0.325) 19(2.925,0.325) 20(2.925,0.975) 21(2.925,1.625) 22(2.925,2.275) 23(2.925,2.925) 24(2.925,3.575)
  silkscreen extent -3.65,-3.9 1.85,4.15, body extent -3.19,-3.9 3.19,3.9, height 1.1
SOP65P640X110-20N [mm]
  rect 1.45x0.45 smd: 1(-2.925,2.925) 2(-2.925,2.275) 3(-2.925,1.625) 4(-2.925,0.975) 5(-2.925,0.325) 6(-2.925,-0.325) 7(-2.925,-0.975) 8(-2.925,-1.625) 9(-2.925,-2.275) 10(-2.925,-2.925) 11(2.925,-2.925) 12(2.925,-2.275) 13(2.925,-1.625) 14(2.925,-0.975) 15(2.925,-0.325) 16(2.925,0.325) 17(2.925,0.975) 18(2.925,1.625) 19(2.925,2.275) 20(2.925,2.925)
  silkscreen extent -3.65,-3.25 1.85,3.5
STM-TO-220A-3 [mm] "FM, 3-Leads, Body 10.4x4.6mm, Pitch 2.55mm"
  rect 1.7x1.7 hole 1.1: 1(0,2.55)
  round 1.7 hole 1.1: 2(0,0) 3(0,-2.55)
  silkscreen extent -1.74,-5.18 2.86,6, body extent -1.74,-5.18 2.86,5.23, height 19.68

## Part data
B1: "144MHz, Industrial-grade general-purpose microcontrollers TSSOP20 Package", Manufacturer_Name=WCH, Datasheet Link=https://data.electronshik.ru/z/Datasheet/C/CH32V203K8T6.PDF, Geometry.Height=1.1mm, Manufacturer_Part_Number=ch32v203f6p6
D1 D2 D4 D6 D8 D18 D19 D20 D21 D22: library part Diode, "Diode", AF=1, BV=0, BV_MAX=1e99, CJO=0, CJP=0, CTA=0, CTP=0, EG=1.11, FC=0.5, FCS=0.5, FV_MAX=1e99, IBV=0.001, IKF=0, IKR=0, IS=1e-14, ISR=1e-14, JSW=0, JTUN=0, JTUNSW=0, KEG=1, KF=0, LEVEL=1, MJSW=0.33, N=1, NBV=1, NR=1, NS=1, NTUN=30, PHP=1, RS=0, SimulationGenericComponent=True, TCV=0, TLEV=0, TLEVC=0, TM1=0, TM2=0, TNOM=27, TPB=0, TPHP=0, TRS=0, TRS2=0, TT=0, TTT1=0, TTT2=0, VJ=1, XTI=3, XTITUN=3
D9 D10 D11 D12 D13 D14 D15 D16: library part LED, AF=1, BV=0, BV_MAX=1e99, CJO=0, CJP=0, CTA=0, CTP=0, EG=1.11, FC=0.5, FCS=0.5, FV_MAX=1e99, IBV=0.001, IKF=0, IKR=0, IS=1e-14, ISR=1e-14, JSW=0, JTUN=0, JTUNSW=0, KEG=1, KF=0, LEVEL=1, MJSW=0.33, N=1, NBV=1, NR=1, NS=1, NTUN=30, PHP=1, RS=0, SimulationGenericComponent=True, TCV=0, TLEV=0, TLEVC=0, TM1=0, TM2=0, TNOM=27, TPB=0, TPHP=0, TRS=0, TRS2=0, TT=0, TTT1=0, TTT2=0, VJ=1, XTI=3, XTITUN=3
IC1: "Integrated Circuit", Manufacturer_Name=STMicroelectronics, Mouser Part Number=N/A, Datasheet Link=https://www.st.com/resource/en/datasheet/cd00005085.pdf, Height=1.1mm, Manufacturer_Part_Number=STP16C596ATTR, Mouser Price/Stock=https://www.mouser.co.uk/ProductDetail/STMicroelectronics/STP16C596ATTR?qs=y2Ae8b0edtM6tyumk2sS7g%3D%3D
J1: library part CMP-2000-05246-2, "CONN RCPT USB2.0 MICRO B SMD R/A", Current Rating=1.8A, Manufacturer=Molex, Package=0, Temperature="-30°C to +85°C", Temperature Range High=+85°C, Temperature Range Low=-30°C, Voltage Rating=30V, Automotive=No, Category=Conn, ComponentLink2Description=Datasheet, ComponentLink2URL=https://www.molex.com/webdocs/datasheets/pdf/en-us/0473460001_IO_CONNECTORS.pdf, Conn Orientation="Right Angle", Contact Material=Gold,Nickel, Device Class L1=Connectors, Device Class L2="USB Connectors", Device Class L3=unset, Digikey Description="CONN RCPT USB2.0 MICRO B SMD R/A", Footprint Url=https://www.molex.com/pdm_docs/sd/473460001_sd.pdf, Height=2.945mm, Is Female=yes, Lead Free=Yes, Manufacturer Part Number=473460001, Number of Contacts=5, Octopart=https://octopart.com/47346-0001-molex-7164928, Pitch=0.65mm, RoHS=TRUE, Shielding=true, Usb Standard="USB 2.0"
Q1 Q2 Q3 Q4 Q5 Q6: library part CMP-2000-07168-1, "N-Channel STripFET(TM) II Power MOSFET, 55 V, 80 A, 5 mOhm, -55 to 175 degC, 3-Pin TO-220, RoHS, Tube", Manufacturer=STMicroelectronics, Maximum Continuous Drain Current=80A, Maximum Drain Source Resistance=0.007Ω, Maximum Drain Source Voltage=55V, Maximum Gate Source Voltage=±20V, Maximum Gate Threshold Voltage=4V, Maximum Operating Temperature=+175°C, Maximum Power Dissipation=300W, Minimum Gate Threshold Voltage=2V, Minimum Operating Temperature=-55°C, Package Description="3-Pin Transistor Outline Package, 10.2 x 4.5 mm, Pitch 2.55 mm", Package Reference=TO-220, Typical Input Capacitance @ Vds=4400pF@25V, Category=PowerMOSFET, Channel Mode=Enhancement, Channel Type=N, Datasheet URL=http://www.st.com/content/ccc/resource/technical/document/datasheet/f1/46/49/9e/39/8f/49/aa/CD00002670.pdf/files/CD00002670.pdf/jcr:content/translations/en.CD00002670.pdf, Datasheet Version="Rev. 8, 10/2006", Dimensions=10.4x4.6x9.15mm, Height=9.15mm, Length=10.4mm, Manufacturer URL=http://www.st.com/, Mounting Technology=ThroughHole, Mounting Type=ThroughHole, Number of Elements per Chip=1, Package Type=TO-220, Package URL=http://www.st.com/st-web-ui/static/active/en/resource/technical/document/datasheet/CD00000544.pdf, Pin Count=3, Transistor Configuration=Single, Transistor Material=Si, Typical Gate Charge @ Vgs=142nC@10V, Typical Turn-Off Delay Time=125ns, Typical Turn-On Delay Time=27ns, Width=4.6mm
TP1 TP2 TP3 TP4 TP5 TP6 TP7 TP8 TP9 TP10 TP11 TP12 TP13 TP14 TP15 TP16 TP17 TP18 TP19 TP20 TP21 TP22 TP23 TP24 TP25 TP26 TP27 TP28 TP29 TP30 TP31 TP32 TP33 TP34 TP35 TP36 TP37 TP38 TP39 TP40 TP41 TP42 TP43 TP44 TP45 TP46 TP47: library part TEST_PAD
U1 U7: library part CMP-209535-000001-1, "LDO Voltage Regulators 1A, 3.3V", Dropout Voltage=1.1V, Manufacturer="Advanced Monolithic Systems", Max Junction Temp=+125°C, Max Power Dissipation=1.2W, Max Supply Voltage=15V, Nominal Supply Current=5mA, Output Current=1A, Output Voltage=3.3V, Package=AMS1117, Temperature="-40°C to +125°C", Temperature Range Low=-40°C, Automotive=No, Category=IC, ComponentLink2Description=Datasheet, ComponentLink2URL=http://www.advanced-monolithic.com/pdf/ds1117.pdf, Device Class L1="Integrated Circuits (ICs)", Device Class L2="Power Management ICs", Device Class L3="Voltage Regulators - Linear", Height=1.8mm, Ipc Land Pattern Name=SOT229P700X180-4, Lead Free=Yes, Manufacturer Part Number=AMS1117-3.3, Number Of Outputs=1, Octopart=https://octopart.com/ams1117-3.3-advanced+monolithic+systems-25899300, Output Type=Fixed, RoHS=TRUE, Standoff Height=0.64mm, Temperature Range High=+125°C
U2: library part CMP-0293-00078-1, "Low Power, 12.65 mW, 2.3 V to 5.5 V, Programmable Waveform Generator, 10-Bit, Serial, RM-10, 3000 Reel, Pb-Free", Code_JEDEC=MO-187-BA, Compliance Range (V)=650mV, ComponentLink1Description="Manufacturer URL", ComponentLink1URL=www.analog.com, ComponentLink2Description=Datasheet, ComponentLink2URL=http://www.analog.com/static/imported-files/data_sheets/AD9833.pdf, ComponentLink3Description="Package Specification", ComponentLink3URL=http://www.analog.com/static/imported-files/packages/PKG_PDF/MSOP%28RM%29/RM_10.pdf, DatasheetVersion="Rev. D", FS Iout (mA nom)=3mA, I Supply total (max)=5.5mA, I/O Interface=Serial, Master fclk=25MHz, PackageDescription="10-Lead Mini Small Outline Package [MSOP]", PackageReference=RM-10, PackageVersion=5/8/2005, REFCLK Multiplier=No, Resolution (Bits)=10bit, Tuning Word Width (bits)=28bit
U3 U4 U5 U6: library part CMP-0055-01325-3, "Low Power Single Op Amp, 5-pin SOT-23", Manufacturer="Texas Instruments", Package Reference=DBV0005A, PackageTopMarking=A63A*XTT, PowerWise=N, ComponentLink1Description="Datasheet URL", ComponentLink1URL=http://www.ti.com/general/docs/lit/getliterature.tsp?genericPartNumber=LM321&fileType=pdf, CompType=Amplifiers, PackageDescription="Molded SOT-23, .115 x .063 x .040 in Body, 5 Lead, .0375 in Pitch", PinCount=5, RoHS=N
C1 C2 C3 C4 C5 C6 C7 C8 C9 C10 C11 C12 C13 C14 C15 C16 C17 C18 C19 C20 C21 C22 C23 C24: SimulationGenericComponent=True
D3: AF=1, BV=5.1V, BV_MAX=1e99, CJO=0, CJP=0, CTA=0, CTP=0, EG=1.11, FC=0.5, FCS=0.5, FV_MAX=1e99, IBV=0.001, IKF=0, IKR=0, IS=1e-14, ISR=1e-14, JSW=0, JTUN=0, JTUNSW=0, KEG=1, KF=0, LEVEL=1, MJSW=0.33, N=1, NBV=1, NR=1, NS=1, NTUN=30, PHP=1, RS=0, SimulationGenericComponent=True, TCV=0, TLEV=0, TLEVC=0, TM1=0, TM2=0, TNOM=27, TPB=0, TPHP=0, TRS=0, TRS2=0, TT=0, TTT1=0, TTT2=0, VJ=1, XTI=3, XTITUN=3
D5 D7 D17: AF=1, BV=0, BV_MAX=1e99, CJO=0, CJP=0, CTA=0, CTP=0, EG=1.11, FC=0.5, FCS=0.5, FV_MAX=1e99, IBV=0.001, IKF=0, IKR=0, IS=1e-14, ISR=1e-14, JSW=0, JTUN=0, JTUNSW=0, KEG=1, KF=0, LEVEL=1, MJSW=0.33, N=1, NBV=1, NR=1, NS=1, NTUN=30, PHP=1, RS=0, SimulationGenericComponent=True, TCV=0, TLEV=0, TLEVC=0, TM1=0, TM2=0, TNOM=27, TPB=0, TPHP=0, TRS=0, TRS2=0, TT=0, TTT1=0, TTT2=0, VJ=1, XTI=3, XTITUN=3
R1 R2 R3 R4 R5 R6 R7 R8 R9 R10 R11 R12 R13 R14 R15 R16 R17 R18 R19 R20 R21 R22 R23 R24 R25 R26 R27 R28 R29 R30 R31 R32 R33 R34 R35 R36 R37 R38 R39 R40 R41 R42 R43 R44 R45 R46 R47 R48 R49 R50: SimulationGenericComponent=True, TC1=0, TC2=0

## Via types
v1: diameter 40, hole 25, Top Layer to Bottom Layer, 300 vias
v2: diameter 50, hole 30, Top Layer to Bottom Layer, tented both sides, 22 vias
v3: diameter 40/40 (per signal layer), hole 25, Top Layer to Bottom Layer, tented both sides, 8 vias
v4: diameter 25/25 (per signal layer), hole 15, Top Layer to Bottom Layer, tented both sides, 7 vias
v5: diameter 40, hole 25, Top Layer to Bottom Layer, tented both sides, 5 vias

## Nets (pads, with @x,y where several pads share a name; then routed paths per layer and width w, separated by ;. In a path a pad name is that pad's centre, name@x,y a point inside that pad or via, vN(x,y) a via of type N, cw(c..) or ccw(c..) an arc to the next point about the centre after c; other vN are vias at no path point)
3V3: B1.5 B1.16 C2.2 C3.1 C4.1 C5.2 C6.2 C7.1 C24.2 CASTH1.5 CP1.1 D5.1 D7.1 D17.1 D20.2 D21.2 D22.2 DR1.1 DR2.1 DR3.1 IC1.24 R1.2 R9.2 R10.2 R11.2 R12.2 R13.2 R14.2 R15.2 R16.2 R18.2 R19.2 R20.2 R21.2 R22.2 R23.2 R24.2 R25.2 TP15.1 TP45.1 U1.4 U2.2 U7.2 U7.4 | length 14241.5
  Top Layer w7: C5.2@3400,4354.41 3404.72,4349.69 U2.2@3492.32,4349.69 3542.19,4349.69 3575,4316.88 3575,4224.41 C6.2@3570.59,4220 3571.18,4219.41 3571.18,4165.59 C7.1@3570.59,4165 3580.87,4154.72 3580.87,3020.63 3615.5,2986 3615.5,2873.19 3615.68,2873.01 3615.68,2870.94 3626.58,2860.04 C3.1@3626.58,2793.42
  Top Layer w10: TP15.1@3345,4375 3348.12,4375 3368.12,4355 3399.41,4355 C5.2@3400,4354.41 ; 3550.49,2564.7 3550.49,2569.88 3562.5,2581.88 v2(3562.5,2590) ; C4.1@3616.58,2441.58 3642.91,2467.91 3642.91,2496.14 3650.63,2503.86 3650.63,2536.13 3665,2550.5 3665,2579.5 3660,2584.5 3660,2597.96 3667.23,2605.19 3667.23,2677.77 3650.04,2694.96 3650.04,2727.05 B1.16@3646.77,2730.32 3646.77,2773.23 C3.1@3626.58,2793.42 ; C24.2@4733.68,2802.27 4887.68,2802.27 4899.41,2790.54 R18.2@4899.41,2790 ; R25.2@4750,3975.59 R24.2@4810,3975.59 4814.6,3971 4850.4,3971 ; v2@4896.3,3926.9 4905.71,3936.3 4907.68,3936.3 4919.41,3948.03 R23.2@4919.41,3950 ; R20.2@5035,3349.41 5035,3270 5080,3225 5235,3225 ; R21.2@5045,3585.59 5046.97,3585.59 5058.7,3597.32 5058.7,3599.29 5060,3600.59 5060,3660 5110,3710 5270,3710 ; R19.2@5061.18,2790 5245,2790 5250,2785 ; R22.2@5065.59,3875 5265,3875 5270,3870
  Top Layer w15: 3772.98,2662.98 3787.76,2677.76 3787.76,2685.12 3827.64,2725 CASTH1.5@3832,2725 CASTH1.5@3880,2725 ; R9.2@3984.41,3300 R10.2@3984.41,3360 R11.2@3984.41,3420 R12.2@3984.41,3480 R13.2@3984.41,3540 R14.2@3984.41,3600 R15.2@3984.41,3660 R16.2@3984.41,3720 ; 5154.8,2419.77 5154.8,2422.91 ; DR2.1@5181.71,3453.88 5250,3453.88 ; DR1.1@5185.47,4505 5190,4509.53 5190,4570 5222.85,4602.85 5222.85,4634.86 5237.99,4650 D5.1@5240.94,4650
  Top Layer w20: 3613.43,2605 3659.81,2605 3660,2605.19 3667.23,2605.19 3715.19,2605.19 3772.98,2662.98 ; TP45.1@4310,3225 4310,3265 4364.25,3319.25 IC1.24@4384.84,3319.25 ; DR3.1@5131.71,2333.88 5153.85,2333.88 5154.8,2334.82 5154.8,2347 ; DR1.1@5180,4505 DR1.1@5185.47,4505 ; D17.1@5181.09,2480.15 D17.1@5190.94,2490 ; D7.1@5240.94,3620 5243.9,3620 5256.54,3632.64 D7.1@5256.54,3638.54
  Top Layer w25: R1.2@3485,2524.49 3489.23,2528.72 3501.22,2528.72 v2(3562.5,2590) 3569.26,2590 3584.26,2605 3613.43,2605 ; R1.2@3491.88,2516.88 3440,2465 CP1.1@3440,2360 3445.36,2354.64 3445.36,2259.64 3528.31,2176.69 ; v2(3610,2175) 3608.31,2176.69 3528.31,2176.69 ; v2(4330,2625) 4336.76,2625 4355.12,2643.36 4525,2643.36 U7.4@4536.1,2654.45 ; U7.2@4553.68,2901.86 U7.2@4553.68,2906.99 ; U7.2@4555.47,2895.48 U7.2@4555.47,2905.21 ; D22.2@5163.07,1215 4970,1215 4927.19,1257.81 4572.26,1257.81 4570,1260.08 D21.2@4570,1265 3860,1265 3594.04,1530.96 3594.04,1694.04 3528.31,1759.76 3528.31,2176.69
  Top Layer w30: R9.2@3984.41,3300 3986.06,3298.35 3986.06,3262.57 4023.63,3225 TP45.1@4310,3225 ; U7.4@4536.1,2654.45 4536.1,2790 ; U7.2@4553.68,2901.86 4536.1,2884.28 4536.1,2790 ; U7.2@4555.47,2895.48 4648.68,2802.27 C24.2@4733.68,2802.27 ; v2(4582.43,2782.43) 4582.31,2782.55 4543.55,2782.55 4536.1,2790 ; 4860,3965 4860,3961.4 4877.57,3943.83 4886.17,3943.83 v2(4890,3940) ; v2(5135,3790) 5165,3820 5270,3820 ; v2(5145,3090) 5250,3090 ; 5154.8,2347 5154.8,2419.77 ; 5154.8,2422.91 5181.09,2449.2 D17.1@5181.09,2480.15 ; DR1.1@5185.47,4505 5245,4505 5270,4480 5270,3870 5270,3820 ; D17.1@5190.94,2490 5198.58,2497.64 5217.43,2497.64 5250,2530.21 5250,2785 5250,3090 ; D7.1@5240.94,3620 5242.36,3620 5250,3612.36 5250,3453.88 5250,3090 ; D7.1@5256.54,3638.54 5270,3652.01 5270,3710 5270,3820
  Bottom Layer w10: C2.2@3425.59,2545 U1.4@3515,2545
  Bottom Layer w20: U1.4@3515,2545 3549.45,2545 U1.4@3558.67,2554.22 ; v2@3558.67,2586.17 v2(3562.5,2590)
  Bottom Layer w25: U1.4@3558.67,2554.22 v2@3558.67,2586.17 ; v2(3610,2175) 3975,2175 4330,2530 v2(4330,2625)
  Bottom Layer w30: v2(4245,3225) 4390,3225 4582.43,3032.57 v2(4582.43,2782.43) 4682.43,2782.43 4990,3090 v2(5145,3090) ; v2(4890,3940) 4892,3938 4927,3938 5075,3790 v2(5135,3790)
12V: C1.2 C22.2 C23.2 D1.2 Q1.2 Q3.2 Q5.2 R2.2 R3.2 R4.2 S_PAD1.1 U1.3 U7.3 | length 8043.9
  Top Layer w15: D1.2@3429.06,2840 3432.01,2840 3447.15,2855.14 3447.15,2858.09 3460,2870.94 3460,2871.21 3468.79,2880 v3(3475,2880)
  Top Layer w25: v2(3800,3175) 3800,3875 4215,4290 4316.18,4290 4396.18,4370 C22.2@4428.66,4370 ; R2.2@4110,2565.59 R3.2@4170,2565.59 R4.2@4230,2565.59 4230,2778.24 4245,2793.24 v2(4245,2800) 4377.37,2800 C23.2@4378.68,2798.68 4383.6,2798.68 4387.83,2802.92 4387.83,2817.58 ; 4387.83,2828.7 4463.52,2904.39 U7.3@4463.52,2906.99
  Top Layer w100: C22.2@4428.66,4370 4435.94,4370 4448.54,4382.6 4448.54,4389.88 4530,4471.34 S_PAD1.1@4530,4790 5831.47,4790 ; Q5.2@5968.07,2442.32 5923.75,2442.32 5831.47,2534.61 5831.47,3684.61 ; Q3.2@5968.07,3592.32 5923.75,3592.32 5831.47,3684.61 ; Q1.2@5968.07,4697.72 5923.75,4697.72 5831.47,4790 ; 5831.47,3684.61 5831.47,4790
  Bottom Layer w15: U1.3@3605.16,2804.45 3605.16,2810.66 3620,2825.51 3620,2891.21 3611.21,2900 3611.21,2905.44
  Bottom Layer w20: v3(3475,2880) 3494.31,2899.31 3549.31,2899.31 ; 3611.21,2905.44 3605.08,2899.31 3549.31,2899.31 ; 3800,3100 3612.94,2912.94 3562.94,2912.94 3549.31,2899.31
  Bottom Layer w25: v2(3800,3175) 3800,3100 3800,3074.5 3824.5,3050 4025,3050 4240.81,2834.19 4240.81,2804.19 v2(4245,2800)
+5: C9.2 C13.1 C17.1 C19.1 C21.1 D3.2 R2.1 R3.1 R4.1 U3.5 U4.5 U5.5 U6.5 | length 3249.8
  Top Layer w10: U4.5@3832.6,1855.2 3832.6,1865.78 C21.1@3832.6,1892.99 ; C13.1@4230,2039.41 4231.31,2040.72 4252.92,2040.72 4279.06,2066.85 4279.06,2071.77 U3.5@4284.88,2077.6 ; C17.1@4330,1519.41 4336.81,1512.6 U5.5@4404.8,1512.6 ; C19.1@5015.59,1440 5085,1440 5101.77,1423.23 5101.77,1411.02 U6.5@5107.6,1405.2
  Top Layer w20: C21.1@3820.59,1905 C21.1@3832.6,1892.99 ; U4.5@3832.6,1865.78 3906.82,1940 4075,1940 4095,1920 v2(4230,1920) 4230,1965 4290,2025 4290,2076.77 4289.17,2077.6 U3.5@4284.88,2077.6 ; R2.1@4110,2514.41 R3.1@4170,2514.41 ; v2(4195,1540) 4258.9,1476.1 4286.69,1476.1 ; v2(4200,2245) 4200,2412.91 D3.2@4207.09,2420 4207.09,2431.81 4196.42,2442.48 4184.61,2442.48 4170,2457.09 R3.1@4170,2514.41 ; C9.2@4304.41,2515 4303.82,2514.41 R4.1@4230,2514.41 R3.1@4170,2514.41 ; C17.1@4330,1519.41 4286.69,1476.1 ; U6.5@5107.6,1405.2 5005.2,1405.2 4950,1350 4412.78,1350 4286.69,1476.1
  Bottom Layer w20: v2(4195,1540) 4195,1920 ; v2(4200,2245) 4195,2240 4195,1920 ; v2(4230,1920) 4195,1920